# Altium PCB ESP32.PcbDoc
Units mil, origin at the board's own origin, x right, y up, seen from the top; angles counter-clockwise.
Board outline 1969.08 x 1181.68 mil, 4 copper layers (Top Layer, VCC, GND, Bottom Layer), stack 30.634 mil thick; 40 components, 35 nets, 200 pads, 162 vias.
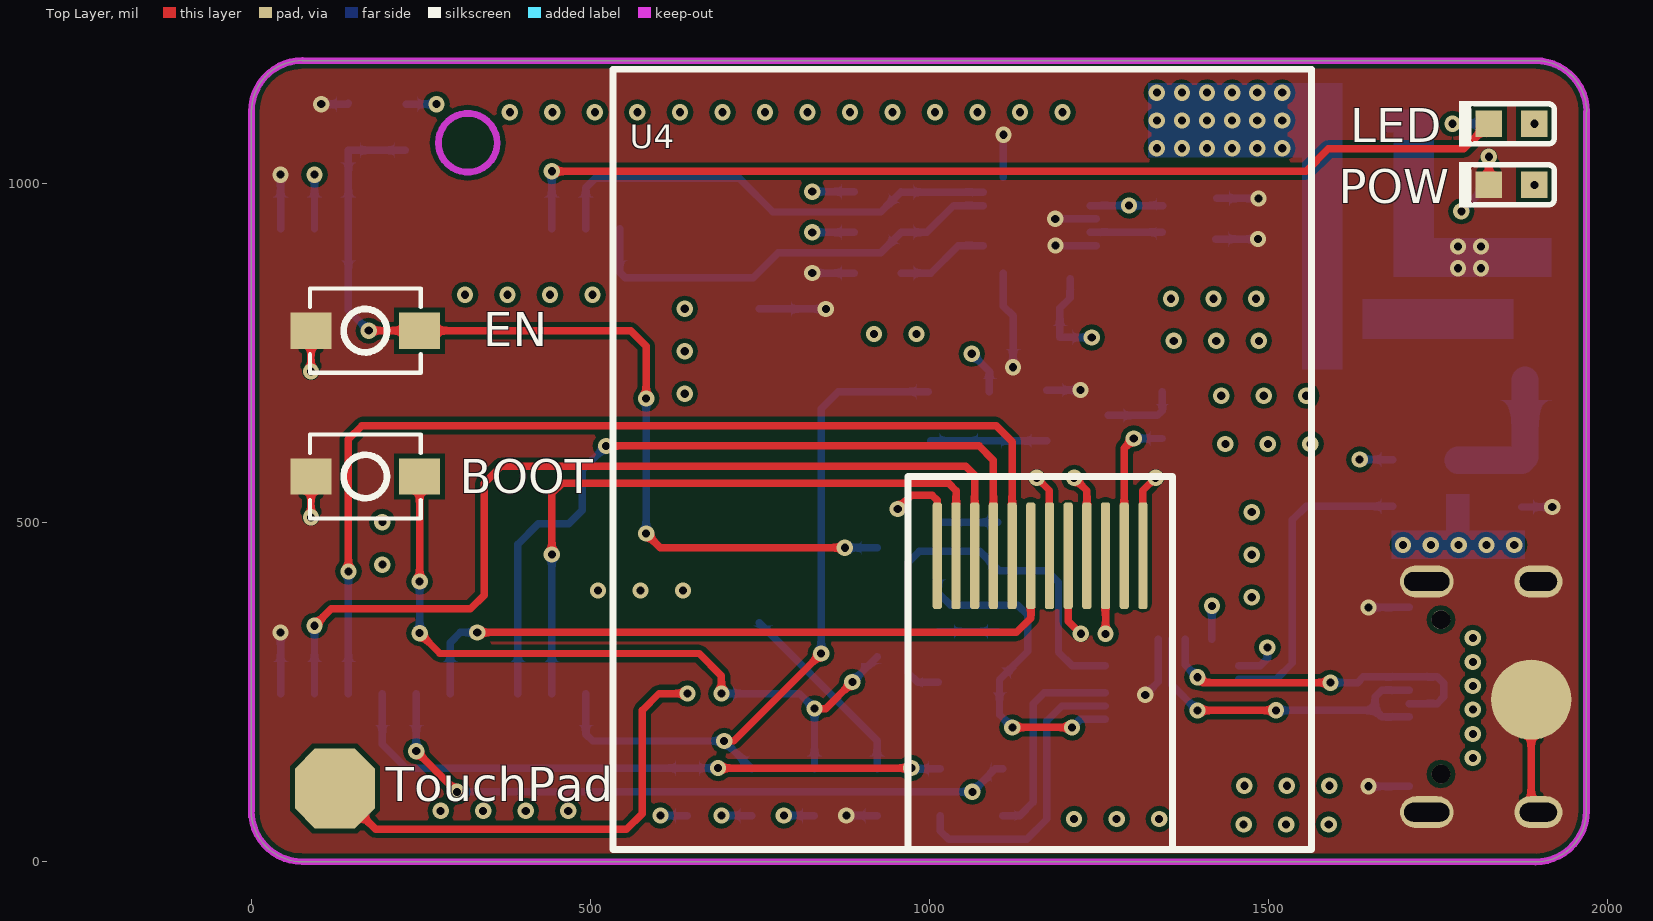
[diagram p0: Top Layer view]
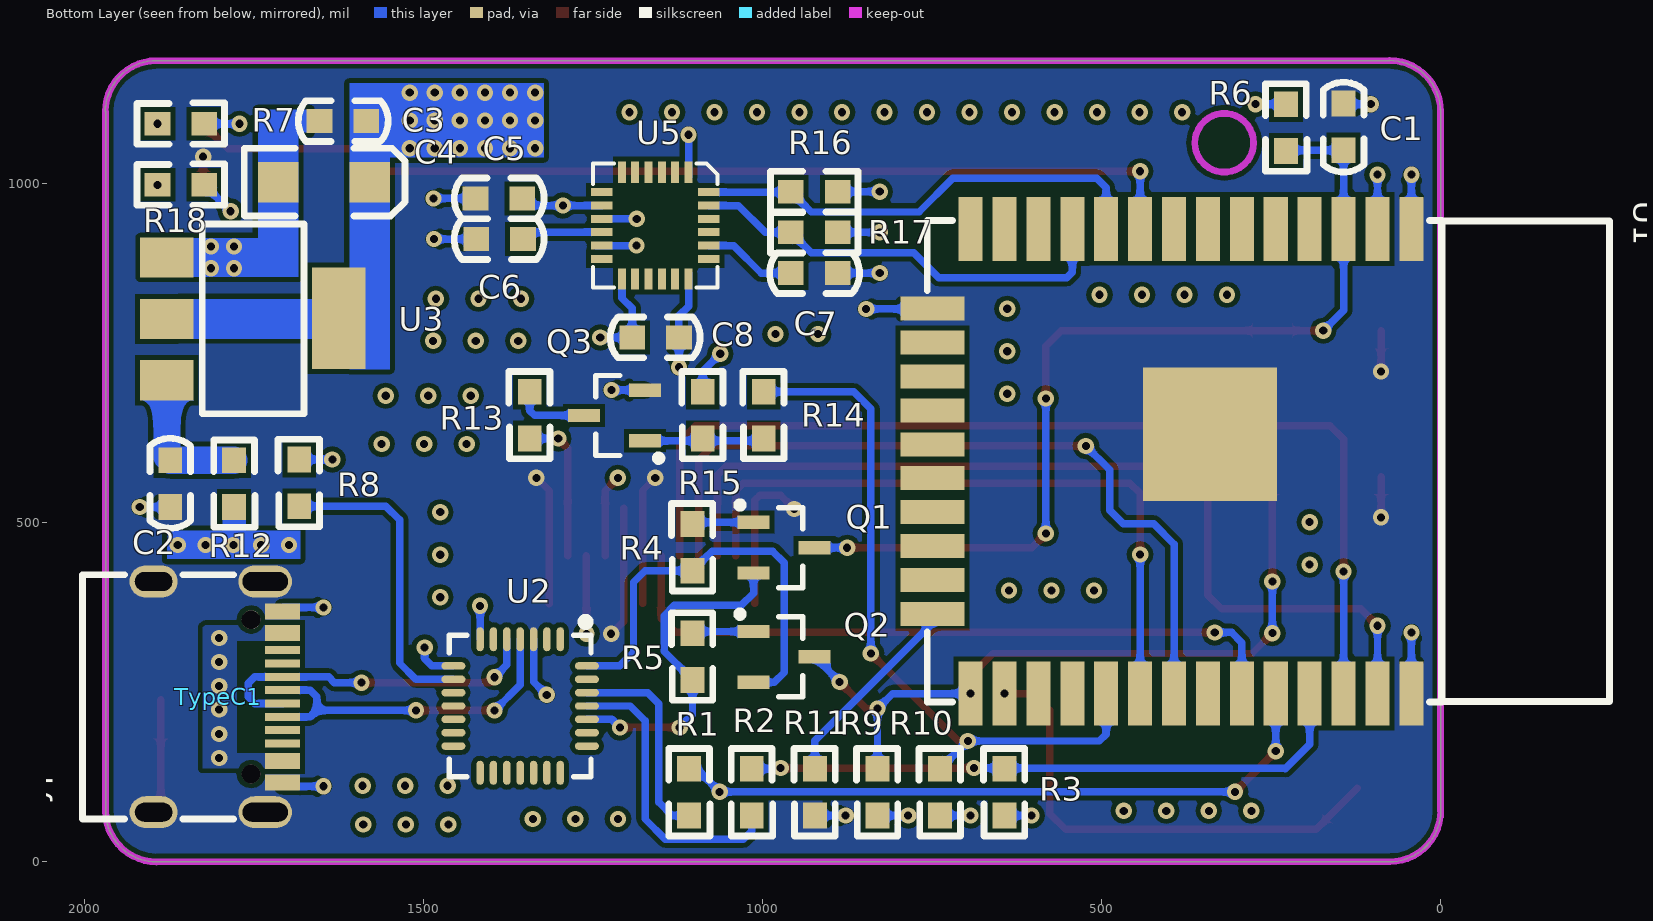
[diagram p1: Bottom Layer view, seen from below]
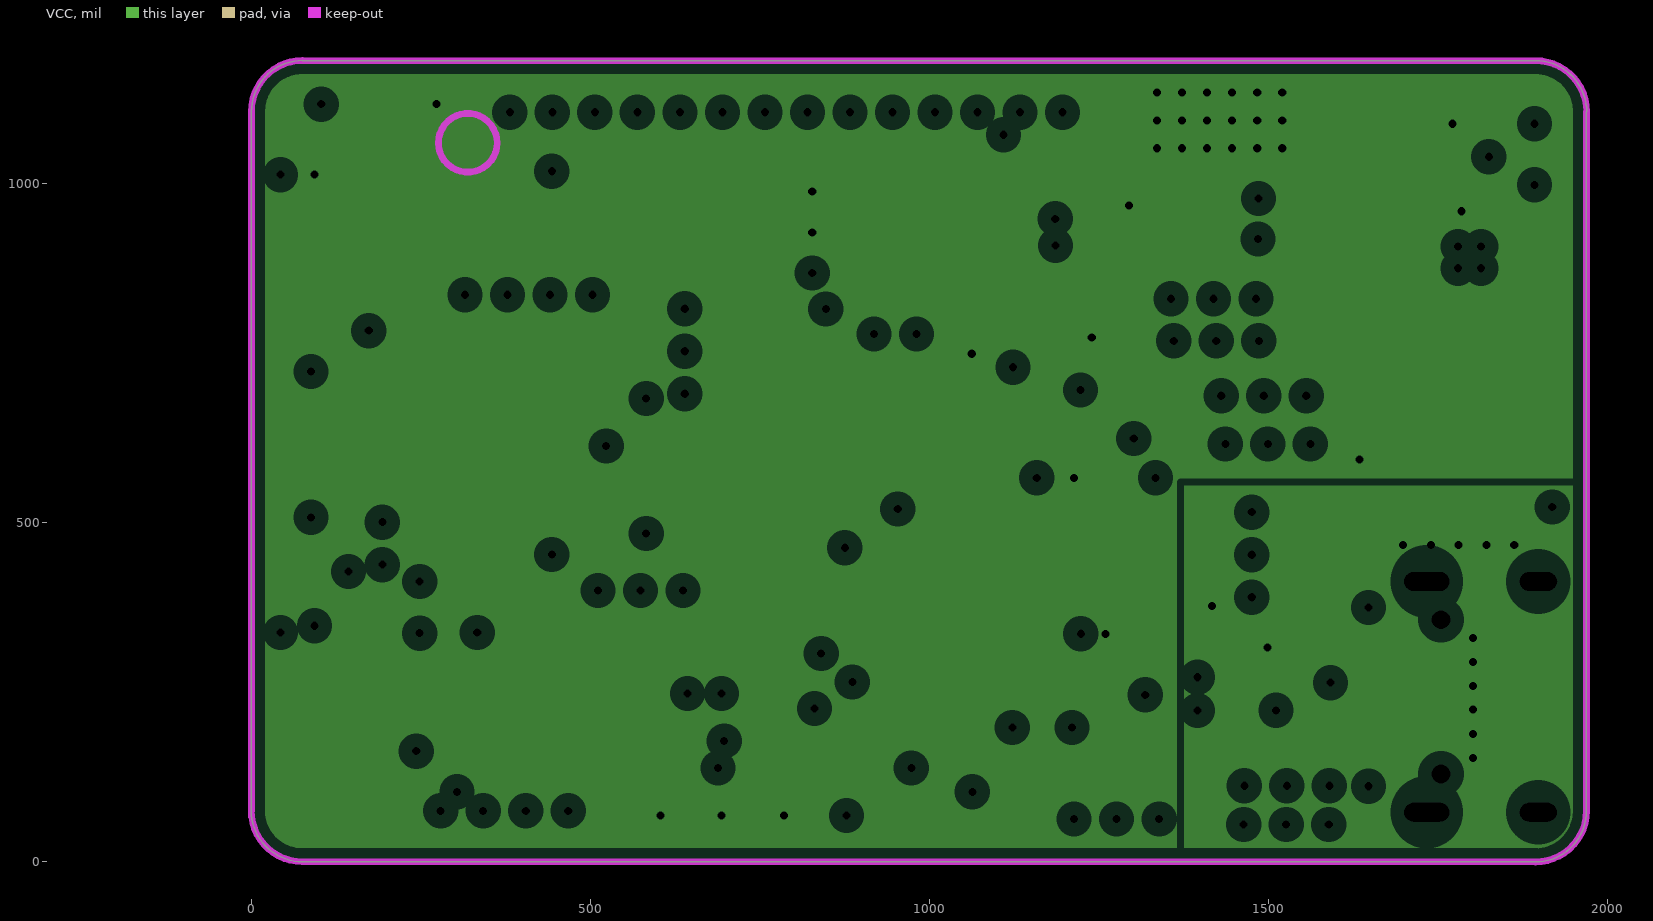
[diagram p2: VCC, clearances drawn from the general rule]
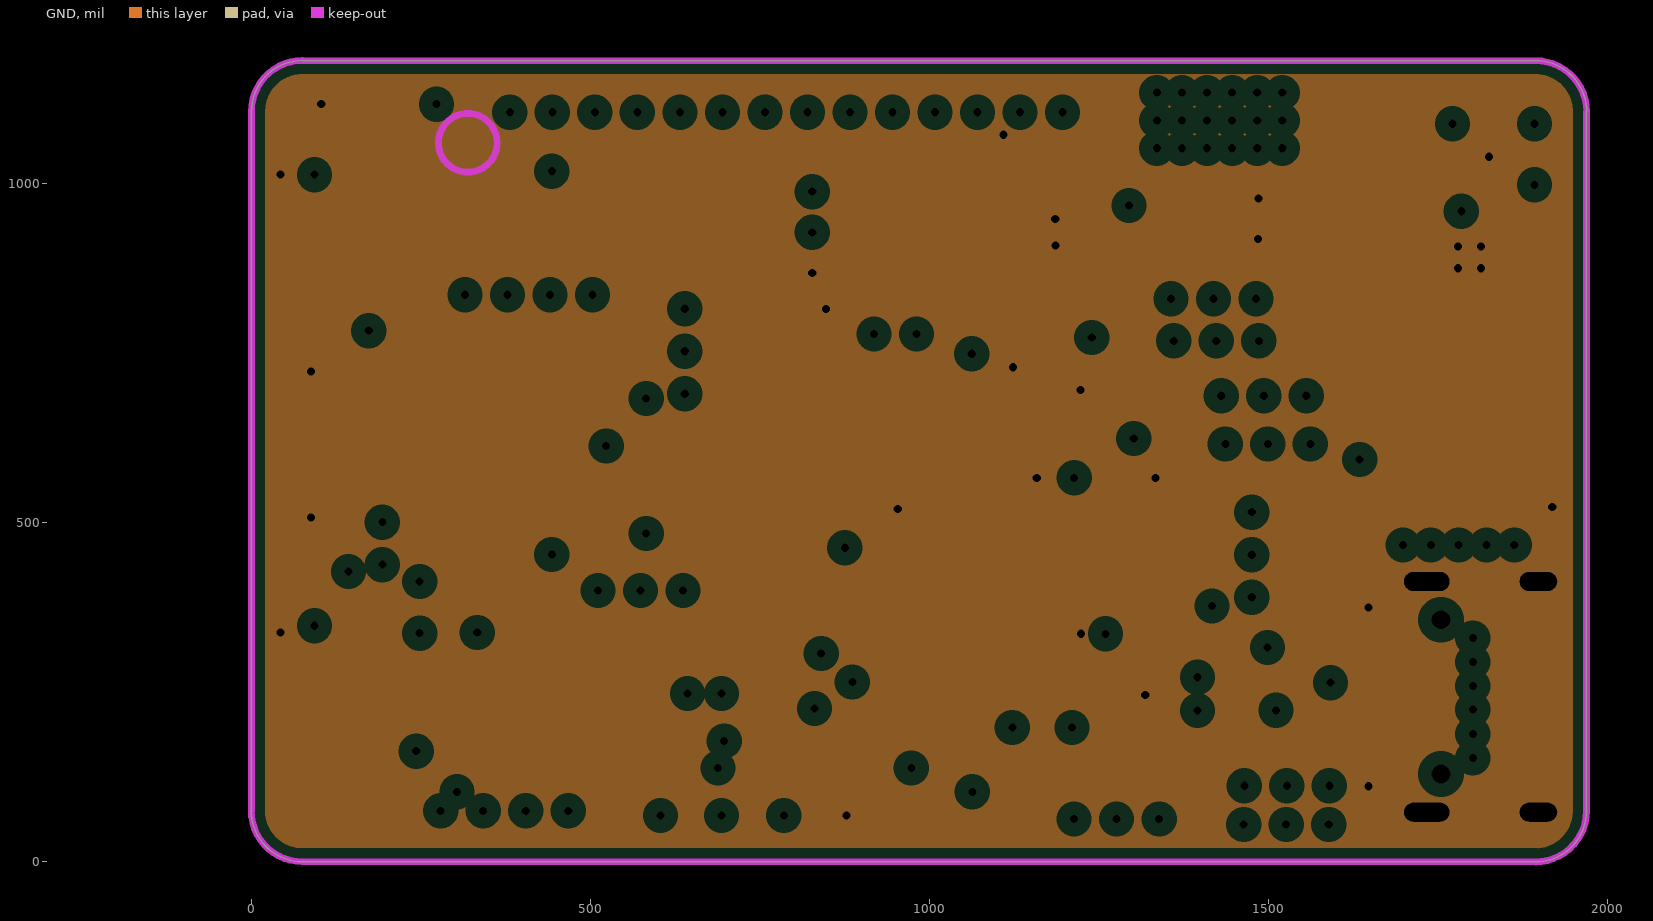
[diagram p3: GND, clearances drawn from the general rule]
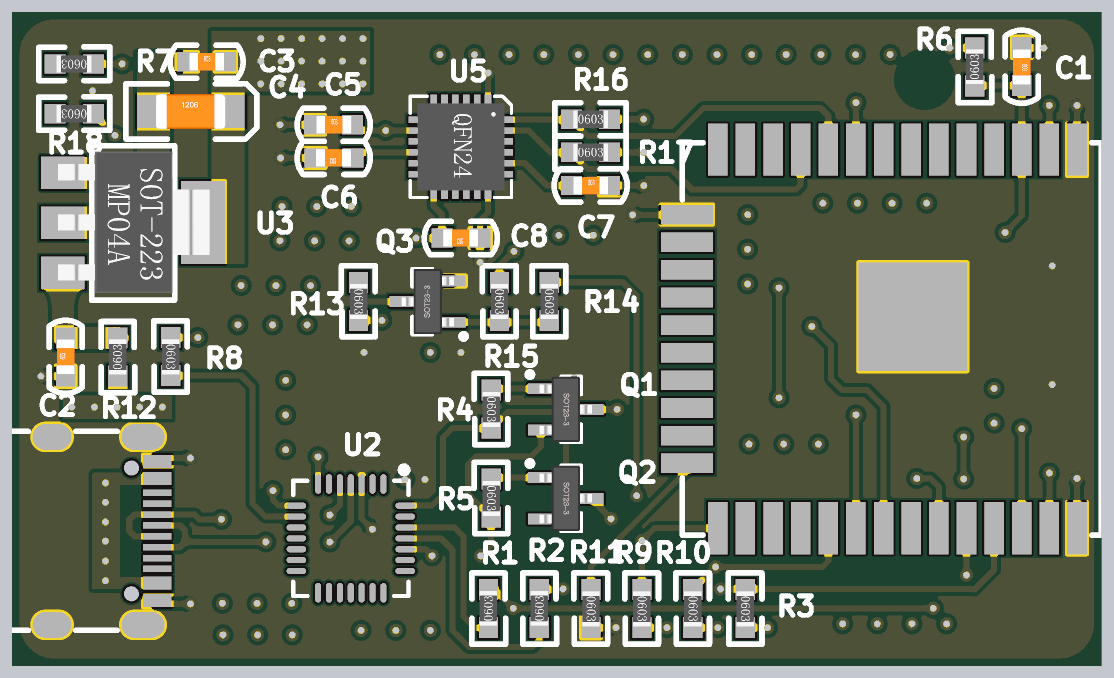
[diagram p4: 3D render of the assembled board from below, using the file's embedded part models]

## Layer stack, top to bottom
Top Solder: solder mask 0.4, Solder Resist, Dk 3.5
Top Layer: signal copper 1.4
Dielectric 1: core 10, FR-4, Dk 4.2
VCC: plane copper 1.417, net 3.3V
Dielectric 3: prepreg 5, Dk 4.2
GND: plane copper 1.417, net GND
Dielectric 2: core 10, Dk 4.2
Bottom Layer: signal copper 1.4
Bottom Solder: solder mask 0.4, Solder Resist, Dk 3.5

## Board outline
0.01,75.28 0.01,1106.12 0,1106.12 cw(c75.28,1106.13) 75.28,1181.4 75,1181.11 1893.52,1181.11 1893.52,1181.12 cw(c1893.53,1105.84) 1968.8,1105.83 1968.51,1105.83 1968.51,75 1968.52,75 cw(c1893.24,74.99) 1893.24,-0.28 1893.24,0.01 75,0.01 75,0 cw(c74.99,75.28)

## Design rules (kind name [scope] priority, off if disabled: settings)
Clearance [All] p1: gap=7
PlaneClearance [All] p1: clearance=20
PlaneConnect [All] p1: planeconnectstyle=Direct reliefexpansion=20 reliefentries=4 reliefconductorwidth=10 reliefairgap=10
PolygonConnect [All] p1: connectstyle=Direct reliefconductorwidth=10 reliefentries=4 polygonreliefangle="90 Angle" airgapwidth=10
RoutingVias [All] p1: holewidth=12 width=24 viastyle="Through Hole" minholewidth=12 minwidth=24 maxholewidth=24 maxwidth=50
SolderMaskExpansion [All] p1: expansion=4
Width [All] p1: maxlimit=200 minlimit=10 preferedwidth=10
28 further rules are at their usual default settings.

## Classes and differential pairs
component class ESP32: C1 C2 C3 C4 C5 C6 C7 C8 Q1 Q2 Q3 R1 R2 R3 R4 R5 R6 R7 R8 R9 R10 R11 R12 R13 R14 R15 R16 R17 R18 TypeC1 U1 U2 U3 U4 U5

## Components (designator, comment, footprint, x,y, rotation, side; value= is the part's Value field where it differs from the comment)
C1 "100nF" C0603 143,1118 r270 bottom
C2 "100nF" C0603 1873,523 r90 bottom
C3 "100nF" C0603 1653,1092 r180 bottom
C4 "10uf钽" C1206A 1643,999 r180 bottom
C5 "10nF" C0603 1423,978 r180 bottom
C6 "100nF" C0603 1353,918 r0 bottom
C7 "2.2nF" C0603 958,868 r180 bottom
C8 "100nF" C0603 1123,773 r0 bottom
D1 "LED" 0603LED_RED 1858,998 r0 top
D2 "LED" 0603LED_RED 1858,1088 r0 top
Q1 "SS8050" SOT23-3N 968,463 r270 bottom
Q2 "SS8050" SOT23-3N 968,302 r270 bottom
Q3 "SS8050" SOT23-3N 1218,658 r90 bottom
R1 "1K" R0603 1108,68 r90 bottom
R2 "1K" R0603 1015.75,68 r90 bottom
R3 "10K" R0603 643,137 r270 bottom
R4 "12K" R0603 1103,498 r270 bottom
R5 "12K" R0603 1103,337 r270 bottom
R6 "10K" R0603 228,1048 r90 bottom
R7 "1K" R0603 1823,998 r0 bottom
R8 "4.7K" R0603 1683,593 r270 bottom
R9 "10K" R0603 830.25,137 r270 bottom
R10 "10K" R0603 738,137 r270 bottom
R11 "10K" R0603 922.5,137 r270 bottom
R12 "0Ω" R0603 1779,523 r90 bottom
R13 "10Ω" R0603 1343,693 r270 bottom
R14 "1K" R0603 998,693 r270 bottom
R15 "10K" R0603 1088,693 r270 bottom
R16 "4.7K" R0603 958,988 r180 bottom
R17 "4.7K" R0603 958,928 r180 bottom
R18 "1K" R0603 1823,1088 r0 bottom
SW1 "3x6x5" 龟仔微动 248,783 r180 top
SW2 "3x6x5" 龟仔微动 248,568 r180 top
T1 "TouchPad" TouchPad 123,108 r0 top
TypeC1 "Type-C 16P" TYPEC 1733,73 r90 bottom locked
U1 "ESP32-WROOM-32(8MB)" ESP32MOUDLE 43,933 r270 bottom locked
U2 "CP2102-GMR" QFN28 1298,328 r0 bottom locked
U3 "LM1117" SOT-223 1748,803 r270 bottom locked
U4 "1.3寸IPS" 1.3寸IPS 533,18 r0 top locked
U5 "MPU6050" QFN24 1158,938 r270 bottom

## Footprints (in the part's own frame and the unit in brackets; to place one, negate y for a bottom-side part, rotate by r counter-clockwise, add the part's x,y. Pads: shape width x height; smd on the part's side, far side on the other; paste and mask are expansions set on the pad)
1.3寸IPS [mm] "240 * 240"
  rrect60% 0.35x4 smd: 1(19.85,11) 2(19.15,11) 3(18.45,11) 4(17.75,11) 5(17.05,11) 6(16.35,11) 7(15.65,11) 8(14.95,11) 9(14.25,11) 10(13.55,11) 11(12.85,11) 12(12.15,11)
  silkscreen extent 0,0 26.16,29.22
0603LED_RED [mm]
  rect 1x1 smd paste+0 mask+0: 1(0.85,0) 2(-0.85,0)
  silkscreen extent -1.97,-0.85 1.6,0.85, body extent -0.92,-0.53 1.09,0.53, height 0.46
C0603 [mil]
  rect 38x35 smd: 1(0,0) 2(69,0)
  silkscreen extent -31,-30 101,30, body extent 4,-16 67,16, height 12
C1206A [mil] "3216/A型"
  rect 60x60 smd: 1(64,3) 2(-71,3)
  silkscreen extent -121,-47 116,53, body extent -67,-28 59,34, height 39
ESP32MOUDLE [mm]
  rect 2.4x0.9 smd: 1(0,0) 2(0,-1.27) 3(0,-2.54) 4(0,-3.81) 5(0,-5.08) 6(0,-6.35) 7(0,-7.62) 8(0,-8.89) 9(0,-10.16) 10(0,-11.43) 11(0,-12.7) 12(0,-13.97) 13(0,-15.24) 14(0,-16.51) 25(17.4,-16.51) 26(17.4,-15.24) 27(17.4,-13.97) 28(17.4,-12.7) 29(17.4,-11.43) 30(17.4,-10.16) 31(17.4,-8.89) 32(17.4,-7.62) 33(17.4,-6.35) 34(17.4,-5.08) 35(17.4,-3.81) 36(17.4,-2.54) 37(17.4,-1.27) 38(17.4,0)
  rect 0.9x2.4 smd: 15(2.985,-17.93) 16(4.255,-17.93) 17(5.525,-17.93) 18(6.795,-17.93) 19(8.065,-17.93) 20(9.335,-17.93) 21(10.605,-17.93) 22(11.875,-17.93) 23(13.145,-17.93) 24(14.415,-17.93)
  rect 5x5 smd: 39(7.683,-7.543)
  silkscreen extent -0.32,-18.14 17.72,7.42
QFN24 [mm]
  rect 0.8x0.3 smd: 1(-2,1.25) 2(-2,0.75) 3(-2,0.25) 4(-2,-0.25) 5(-2,-0.75) 6(-2,-1.25) 13(2,-1.25) 14(2,-0.75) 15(2,-0.25) 16(2,0.25) 17(2,0.75) 18(2,1.25)
  rect 0.3x0.8 smd: 7(-1.25,-2) 8(-0.75,-2) 9(-0.25,-2) 10(0.25,-2) 11(0.75,-2) 12(1.25,-2) 19(1.25,2) 20(0.75,2) 21(0.25,2) 22(-0.25,2) 23(-0.75,2) 24(-1.25,2)
  silkscreen extent -2.32,-2.32 2.32,2.32, body extent -2,-2 2.01,2, height 0.9
QFN28 [mm]
  oval 0.28x0.9 smd: 1(0,0) 2(0.5,0) 3(1.001,0) 4(1.501,0) 5(2.002,0) 6(2.502,0) 7(3.002,0) 15(3.002,5) 16(2.502,5) 17(2.002,5) 18(1.501,5) 19(1.001,5) 20(0.5,5) 21(0,5)
  oval 0.9x0.28 smd: 8(4.001,0.999) 9(4.001,1.499) 10(4.001,1.999) 11(4.001,2.5) 12(4.001,3) 13(4.001,3.501) 14(4.001,4.001) 22(-0.999,4.001) 23(-0.999,3.501) 24(-0.999,3) 25(-0.999,2.5) 26(-0.999,1.999) 27(-0.999,1.499) 28(-0.999,0.999)
  silkscreen extent -1.15,-0.8 4.15,5.15
R0603 [mil] "1/10W"
  rect 38x35 smd: 1(0,0) 2(69,0)
  silkscreen extent -30,-31 99,30, body extent 4,-16 66,16, height 18
SOT23-3N [mm] "3x1.3x1mm(长宽高)"
  rect 0.5x1.2 smd: 1(-0.95,-1.143) 2(0.95,-1.143) 3(0,1.143)
  silkscreen extent -1.72,-1.78 1.5,0.7, body extent -1.5,-1.2 1.5,1.2, height 1.05
SOT-223 [mil]
  rect 59x79 smd: 1(-88,-130) 2(2.55,-130) 3(93.1,-130)
  rect 150x79 smd: 2(1.88,123.54)
  silkscreen extent -137,-78 143,72, body extent -126,-139 130,135, height 67
TouchPad [mm] "电容触摸焊盘"
  oct 3x3 smd: 1(0,0)
TYPEC [mm]
  oval 1.2x2 hole 0.7 slot 1.7 at 90 deg: 0(0,0) 0(8.64,0)
  oval 1.2x1.8 hole 0.7 slot 1.4 at 90 deg: 0(0,4.18) 0(8.64,4.18)
  rect 0.3x1.3 smd: A1(7.67,-0.65) A4(6.87,-0.65) A5(5.57,-0.65) A6(4.57,-0.65) A7(4.07,-0.65) A8(3.07,-0.65) A9(1.77,-0.65) A12(0.97,-0.65) B1(1.27,-0.65) B4(2.07,-0.65) B5(2.57,-0.65) B6(3.57,-0.65) B7(5.07,-0.65) B8(6.07,-0.65) B9(6.57,-0.65) B12(7.37,-0.65)
  round 0.7 hole 0.7 unplated: ""(1.43,0.53) ""(7.21,0.53)
  silkscreen extent -0.25,1.19 8.89,6.84
龟仔微动 [mm]
  rect 1.53x1.36 smd: 1(0,0) 2(4.07,0)
  silkscreen extent -0.04,-1.58 4.11,1.58

## Part data
C1 C2 C3 C5 C6 C7 C8: library part C, "无极性贴片电容"
C4: library part "Cap pol", "大电解"
D1 D2: "Typical RED, GREEN, YELLOW, AMBER GaAs LED"
Q1 Q2 Q3: library part 8050-SMD, "高频放大-NPN型"
R1 R2 R3 R4 R5 R6 R7 R8 R9 R10 R11 R12 R13 R14 R15 R16 R17 R18: library part R, "贴片电阻"
SW1 SW2: library part "TSW 3x6", "3x6轻触开关"
T1: library part T?
TypeC1: library part Type-c-16P
U3: "5V 3V3"
U4: library part 1.3IPS
U5: "六轴传感器"

## Free pads (board coordinates)
  round 118.11 smd: 0(1887,239)

## Via types
v1: diameter 24, hole 12, Top Layer to Bottom Layer, tented both sides, 162 vias

## Nets (pads, with @x,y where several pads share a name; then routed paths per layer and width w, separated by ;. In a path a pad name is that pad's centre, name@x,y a point inside that pad or via, vN(x,y) a via of type N, cw(c..) or ccw(c..) an arc to the next point about the centre after c; other vN are vias at no path point)
3.3V: C3.2 C4.1 C5.2 C8.2 R3.2 R6.2 R7.1 R8.1 R9.2 R10.2 R15.1 R16.2 R17.2 R18.1 U1.2 U3.2 U4.3 U4.4 U5.8 U5.13 | length 1086.3
  Top Layer w11: v1(1213.12,566) 1231.82,547.3 U4.4 ; v1(1259.38,336) U4.3
  Bottom Layer w11: U1.2 v1(93,1013) ; R6.2 v1(273,1117) ; v1(603,68) R3.2 ; v1(693,68) R10.2 ; v1(785,68) R9.2 ; v1(827,928) R17.2 ; v1(827,988) R16.2 ; v1(1062,749) 1088,723 R15.1 ; U5.13 1207.21,831.21 1192,816 C8.2 v1(1239,773) ; U5.8 C5.2@1343.53,967.53 ; v1(1634,593) R8.1 ; v1(1771,1088) R18.1 ; v1(1784,959) R7.1
  other v1: 1294,967.53 1335,1052 1372,1052 1409,1052 1446,1052 1483,1052 1520,1052 1335,1093 1372,1093 1409,1093 1446,1093 1483,1093 1520,1093 1335,1134 1372,1134 1409,1134 1446,1134 1483,1134 1520,1134
"6050 SCL": R17.1 U1.11 U5.23 | length 647.7
  Bottom Layer w11: U1.11 543,869 551,861 740,861 777,898 928,898 R17.1 996,928 1035.53,967.53 U5.23
"6050 SDA": R16.1 U1.10 U5.24 | length 685.4
  Bottom Layer w11: U1.10 493,994 507,1008 719,1008 769,958 928,958 R16.1 ; R16.1@958.79,987.21 U5.24
BLK: R10.1 R14.1 U1.29 | length 1051.9
  Top Layer w11: v1(697,178) 711,178 v1(840,307)
  Bottom Layer w11: U1.29 493,188 503,178 v1(697,178) R10.1 ; v1(840,307) 840,668 865,693 R14.1
CLK: U1.31 U4.9 | length 1165.9
  Top Layer w11: v1(523,613) 1073,613 1094.02,591.98 U4.9
  Bottom Layer w11: U1.31 393,468 423,498 468,498 488,518 488,578 v1(523,613)
CP-RXD: R2.2 R3.1 U1.35 | length 912
  Top Layer w11: v1(688,138) v1(973,138)
  Bottom Layer w11: U1.35 193,173 229,137 230,138 v1(688,138) ; v1@974,137 R2.2
CP-TXD: R1.2 U1.34 | length 988.9
  Top Layer w11: v1(243,163) v1(303,103)
  Bottom Layer w11: v1(243,163) U1.34 ; v1(303,103) v1(1063,103) 1097,137 R1.2
CS: U1.36 U4.8 | length 1540
  Top Layer w11: v1(143,428) 143,623 163,643 1098,643 1121.58,619.42 U4.8
  Bottom Layer w11: U1.36 v1(143,428)
D+: TypeC1.A6 TypeC1.B6 U2.4 | length 512.1
  Top Layer w11: v1(1395,223) 1394.84,223.16 v1(1510.84,223.16)
  Bottom Layer w11: U2.4 1357.1,260.9 v1(1395,223) ; v1(1510.84,223.16) 1656.8,223.16 ; TypeC1.B6 1666.41,213.55 1656.8,223.16 ; TypeC1.A6 1666.57,252.92 1656.8,243.16 1656.8,223.16
D-: TypeC1.A7 TypeC1.B7 U2.5 | length 511.8
  Top Layer w11: v1(1395,272) v1@1402.82,264.18 ; v1@1403,264 v1(1591,264)
  Bottom Layer w11: U2.5 1376.8,290.2 v1(1395,272) ; v1(1591,264) 1631,264 1639.61,272.61 TypeC1.B7 1748.39,272.61 1758,263 1758,243 1748.24,233.24 TypeC1.A7
D/C: U1.33 U4.7 | length 1038.1
  Top Layer w11: v1(333,338) 1128,338 1149.14,359.14 U4.7
  Bottom Layer w11: U1.33 293,323 308,338 v1(333,338)
DTR: Q2.2 R4.2 U2.28 | length 641.2
  Bottom Layer w11: Q2.2 982.4,264.6 968,279 968,441 985,458 1074,458 R4.2 1173,429 1190,412 1190,309 1210.32,288.68 U2.28
EN: C1.2 Q1.3 R6.1 SW1.1 U1.3 | length 1406.7
  Top Layer w11: v1(173,783) SW1.1 559,783 582,760 v1(582,683) ; v1(582,484) 603,463 v1(875,463)
  Bottom Layer w11: v1(173,783) 143,813 U1.3 C1.2 R6.1@227,1049 ; v1(582,484) v1(582,683) ; v1(875,463) Q1.3
GND: C1.1 C2.1 C3.1 C4.2 C5.1 C6.2 C7.2 C8.1 D1.2 pad.0 Q3.2 R11.2 SW1.2 SW2.2 TypeC1.0 TypeC1.A1 TypeC1.A12 TypeC1.B1 TypeC1.B12 U1.1 U1.15 U1.38 U1.39 U2.3 U3.1 U4.1 U4.5 U4.6 U4.12 U5.1 U5.9 U5.11 U5.18 | length 2291.8
  Top Layer w11: v1(87.76,507.76) SW2.2 ; v1(87.76,722.76) SW1.2 ; v1(953,520) 973,540 1004,540 1011.35,532.65 U4.12@1011.35,381 ; v1(1158,566) 1176.7,547.3 U4.6@1176.7,381 ; U4.5@1204.26,521 1204.26,354.84 v1(1222.96,336.14) ; U4.1@1314.5,380 1314.5,547.3 v1(1333.2,566) ; D1.2 v1(1824.53,1039.53) ; TypeC1.0@1887,83.57 pad.0
  Bottom Layer w11: U1.38 v1(43,338) ; U1.1 v1(43,1013) ; v1(103,1117) 142,1117 C1.1 ; U1.15 749.39,815 v1(847,815) ; v1(827,868) C7.2 ; v1(877.25,68) R11.2 ; U5.18@1108.79,868 1108.79,819.21 1123,805 C8.1 v1(1123,729) ; U5.1@1108.79,1009 v1(1108.79,1071.79) ; Q3.2 v1(1222.4,695.4) ; v1(1185.16,947.84) U5.9@1246,947.84 ; v1(1185.53,908.47) U5.11@1246,908.47 ; v1(1318,246) 1337.4,265.4 U2.3 ; C6.2 v1(1484,918) ; C5.1 v1(1485,978) ; v1(1647.17,111.19) TypeC1.A12 ; v1(1647.17,374.97) TypeC1.A1 ; C2.1 v1(1918,523)
  other v1: 1779,875 1813,875 1779,907 1813,907
GPIO0: Q2.3 R9.1 SW2.1 U1.25 | length 1087.7
  Top Layer w11: v1(248,337) 278,307 660,307 693,274 v1(693,247.97) ; v1(248,413) SW2.1 ; v1(830.25,225.75) 846.75,225.75 v1(886,265)
  Bottom Layer w11: v1(248,337) v1(248,413) ; v1(693,247.97) 808.03,247.97 v1(830.25,225.75) R9.1 ; v1(886,265) Q2.3
IO2: R11.1 U1.24 | length 287
  Bottom Layer w11: U1.24@748.9,352.1 922.5,178.5 R11.1
LED: D2.2 U1.9 | length 1495.5
  Top Layer w11: v1(443,1018) 1555,1018 1588,1051 1787.53,1051 D2.2
  Bottom Layer w11: U1.9 v1(443,1018)
LEDK: R13.2 U4.2 | length 220.8
  Top Layer w11: U4.2 1286.94,609.94 v1(1301,624)
  Bottom Layer w11: v1(1301,624) R13.2
MOSI: U1.37 U4.10 | length 1391.5
  Top Layer w11: v1(93,348) 118,373 323,373 343,393 343,558 368,583 1053,583 1066.46,569.54 U4.10
  Bottom Layer w11: U1.37 v1(93,348)
NetC2_2: C2.2 R12.2 U3.3 | length 214
  Bottom Layer w30: C2.2 C2.2@1878,597
  Bottom Layer w40: R12.2 C2.2 ; C2.2@1878,597 U3.3
NetC6_1: C6.1 U5.10 | length 106.1
  Bottom Layer w11: U5.10 C6.1@1342.84,928.16
NetC7_1: C7.1 U5.20 | length 138
  Bottom Layer w11: C7.1 1002,868 1042.47,908.47 U5.20
NetD1_1: D1.1 R7.2
  other v1: 1892,998
NetD2_1: D2.1 R18.2
  other v1: 1892,1088
NetQ1_1: Q1.1 R4.1 | length 87.6
  Bottom Layer w11: Q1.1 R4.1@1100.6,500.4
NetQ2_1: Q2.1 R5.1 | length 87.6
  Bottom Layer w11: Q2.1 R5.1@1100.6,339.4
NetQ3_1: Q3.1 R14.2 R15.2 | length 171.6
  Bottom Layer w11: R14.2@1001.4,620.6 Q3.1
NetQ3_3: Q3.3 R13.1 | length 110.9
  Bottom Layer w11: Q3.3 1336,658 1343,665 R13.1
NetR1_1: R1.1 U2.26 | length 310.7
  Bottom Layer w11: R1.1 1133,68 1153,88 1153,233 1169.28,249.28 U2.26
NetR2_1: R2.1 U2.25 | length 437.1
  Bottom Layer w11: R2.1 1015.75,45.25 1028,33 1143,33 1173,63 1173,208 1194.58,229.58 U2.25
NetR8_2: R8.2 U2.9 | length 456.7
  Bottom Layer w11: U2.9 1510.98,268.98 1535,293 1535,504 1555,524 R8.2
RES: U1.30 U4.11 | length 997.7
  Top Layer w11: v1(443,453) 443,543 458,558 1028,558 1038.91,547.09 U4.11
  Bottom Layer w11: U1.30 v1(443,453)
RTS: Q1.2 R5.2 U2.24 | length 507.1
  Top Layer w11: v1(1122,198) v1(1210,198)
  Bottom Layer w11: Q1.2 1013,396 1031,378 1130,378 1145,363 1145,310 R5.2 1103,217 v1(1122,198) ; v1(1210,198) 1221.88,209.88 U2.24
TOUCH: T1.1 U1.26 | length 716.7
  Top Layer w11: T1.1 183,48 553,48 576,71 576,223 600.97,247.97 v1(643,247.97)
VUSB: R12.1 TypeC1.A4 TypeC1.A9 TypeC1.B4 TypeC1.B9 U2.7 U2.8 | length 112.9
  Bottom Layer w11: U2.7 v1(1416.2,377.2) ; U2.8 1487.68,288.68 1498,299 v1(1498,316)
  other v1: 1801,153 1801,188.4 1801,224.4 1801,259.2 1801,294.6 1801,330 1698,467 1739,467 1780,467 1821,467 1862,467
pads on no net: TypeC1. TypeC1.A5 TypeC1.A8 TypeC1.B5 TypeC1.B8 U1.4 U1.5 U1.6 U1.7 U1.8 U1.12 U1.13 U1.14 U1.16 U1.17 U1.18 U1.19 U1.20 U1.21 U1.22 U1.23 U1.27 U1.28 U1.32 U2.1 U2.2 U2.6 U2.10 U2.11 U2.12 U2.13 U2.14 U2.15 U2.16 U2.17 U2.18 U2.19 U2.20 U2.21 U2.22 U2.23 U2.27 U5.2 U5.3 U5.4 U5.5 U5.6 U5.7 U5.12 U5.14 U5.15 U5.16 U5.17 U5.19 U5.21 U5.22
copper on no net:
  other v1: 1463,55 1525.69,55 1588.38,55 1213,63 1275.69,63 1338.38,63 279,75 341.69,75 404.38,75 467.08,75 1464,112 1526.69,112 1589.38,112 1475,390 511,400 573.69,400 636.38,400 193,438 1475,452.69 193,500.69 1475,515.38 1436,616 1498.69,616 1561.38,616 1430,687 1492.69,687 1555.38,687 639,690 639,752.69 1360,768 1422.69,768 1485.38,768 918,778 980.69,778 639,815.38 1356,830 1418.69,830 1481.38,830 314.92,836 377.62,836 440.31,836 503,836 381,1105 443.69,1105 506.38,1105 569.08,1105 631.77,1105 694.46,1105 757.15,1105 819.85,1105 882.54,1105 945.23,1105 1007.92,1105 1070.62,1105 1133.31,1105 1196,1105

## Polygon pours and split planes (outlines as drawn)
VUSB on Bottom Layer "Top Layer-No Net" (solid, remove dead copper, pour order 6): 1682,349 1825,349 1825,138 1682,138 1682,160 1775,160 1775,326 1682,326
GND on Bottom Layer "Top Layer-No Net 1" (solid, remove dead copper, pour order 8): -170.84,1346 883,1346 2073,1376 2073,-210 -144,-210 -214,-140
GND on Top Layer "Top Layer-No Net 1" (solid, remove dead copper, pour order 7): -129,1259 1121,1284 2189,1284 2189,-151 2113,-227 2106,-220 -184,-220
VUSB on VCC (split plane): 1948.41,75 1948.47,74.41 1948.16,68.81 1947.12,62.7 1945.4,56.74 1943.03,51.02 1940.04,45.59 1936.45,40.54 1932.32,35.92 1927.7,31.79 1922.65,28.2 1917.22,25.2 1911.5,22.83 1905.54,21.12 1899.43,20.08 1895.66,19.87 1893.24,20.1 1375.1,20.1 1375.1,554.9 1948.41,554.9
3.3V on VCC (split plane): 73.18,1161.19 75,1161.01 1893.52,1161.01 1894.11,1161.07 1899.71,1160.76 1905.82,1159.72 1911.78,1158 1917.5,1155.63 1922.93,1152.63 1927.98,1149.05 1932.6,1144.92 1936.73,1140.3 1940.32,1135.24 1943.32,1129.82 1945.69,1124.09 1947.4,1118.14 1948.44,1112.03 1948.65,1108.26 1948.41,1105.83 1948.41,565.1 1370,565.1 1368.05,564.71 1366.4,563.6 1365.29,561.95 1364.9,560 1364.9,20.1 75,20.1 74.4,20.05 68.8,20.36 62.7,21.4 56.74,23.11 51.01,25.49 45.59,28.48 40.54,32.07 35.92,36.2 31.79,40.82 28.2,45.87 25.2,51.3 22.83,57.02 21.12,62.98 20.08,69.09 19.87,72.86 20.1,75.28 20.1,1106.12 20.05,1106.71 20.36,1112.31 21.4,1118.42 23.11,1124.38 25.49,1130.1 28.48,1135.53 32.07,1140.58 36.2,1145.2 40.82,1149.33 45.87,1152.92 51.3,1155.92 57.02,1158.29 62.98,1160 69.09,1161.04 72.63,1161.24
GND on GND (split plane): 73.18,1161.19 75,1161.01 1893.52,1161.01 1894.11,1161.07 1899.71,1160.76 1905.82,1159.72 1911.78,1158 1917.5,1155.63 1922.93,1152.63 1927.98,1149.05 1932.6,1144.92 1936.73,1140.3 1940.32,1135.24 1943.32,1129.82 1945.69,1124.09 1947.4,1118.14 1948.44,1112.03 1948.65,1108.26 1948.41,1105.83 1948.41,75 1948.47,74.41 1948.16,68.81 1947.12,62.7 1945.4,56.74 1943.03,51.02 1940.04,45.59 1936.45,40.54 1932.32,35.92 1927.7,31.79 1922.65,28.2 1917.22,25.2 1911.5,22.83 1905.54,21.12 1899.43,20.08 1895.66,19.87 1893.24,20.1 75,20.1 74.4,20.05 68.8,20.36 62.7,21.4 56.74,23.11 51.01,25.49 45.59,28.48 40.54,32.07 35.92,36.2 31.79,40.82 28.2,45.87 25.2,51.3 22.83,57.02 21.12,62.98 20.08,69.09 19.87,72.86 20.1,75.28 20.1,1106.12 20.05,1106.71 20.36,1112.31 21.4,1118.42 23.11,1124.38 25.49,1130.1 28.48,1135.53 32.07,1140.58 36.2,1145.2 40.82,1149.33 45.87,1152.92 51.3,1155.92 57.02,1158.29 62.98,1160 69.09,1161.04 72.63,1161.24

## Keep-outs
Keep-Out Layer:
  circle w10: c319,1060 r43.31
  lines w10: -0.28,75.28 ccw(c74.99,75.28) 75,0 1893.24,0.01 ; 0.01,75.28 0.01,1106.12 cw(c75.28,1106.13) 75.28,1181.4 ; 75,1181.11 1893.52,1181.11 cw(c1893.53,1105.84) 1968.8,1105.83 ; 1893.24,-0.28 ccw(c1893.24,74.99) 1968.52,75 1968.51,1105.83

## Other copper
Bottom Layer:
  rectangle net GND: 1667,1075 1744,1109
  rectangle net 3.3V: 1638,771 1861,830
  rectangle net GND: 1684,862 1797,920
  rectangle net GND: 1684,862 1744,1109
  rectangle net GND: 1766,862 1917,920
  rectangle net VUSB: 1681,446 1878,488
  rectangle net VUSB: 1761,446 1796,542
  rectangle net 3.3V: 1322,1038 1557,1148
  rectangle net 3.3V: 1549,726 1609,1148
VCC (plane layer: these items are gaps in the copper):
  lines w10: 46.81,1181.2 1921.7,1181.2 ; 1370,0 1370,560 1968.51,560
GND (plane layer: these items are gaps in the copper):
  lines w10: 46.81,1181.18 1921.76,1181.18

## Silkscreen, mask and mechanical layers (free items; w line width, h text height)
Top Overlay:
  text "LED" at 1620,1061 h50
  text "POW" at 1603,971 h50
  text "EN" at 342,760 h50
  text "BOOT" at 307,543 h50
  text "TouchPad" at 198,89 h50